# Altium PCB power_blank.PcbDoc
Units mm, origin at the board's own origin, x right, y up, seen from the top; angles counter-clockwise.
Board outline 63.5 x 38.1 mm, 2 copper layers (Top Layer, Bottom Layer); 4 components, 0 nets, 18 pads, 0 vias.
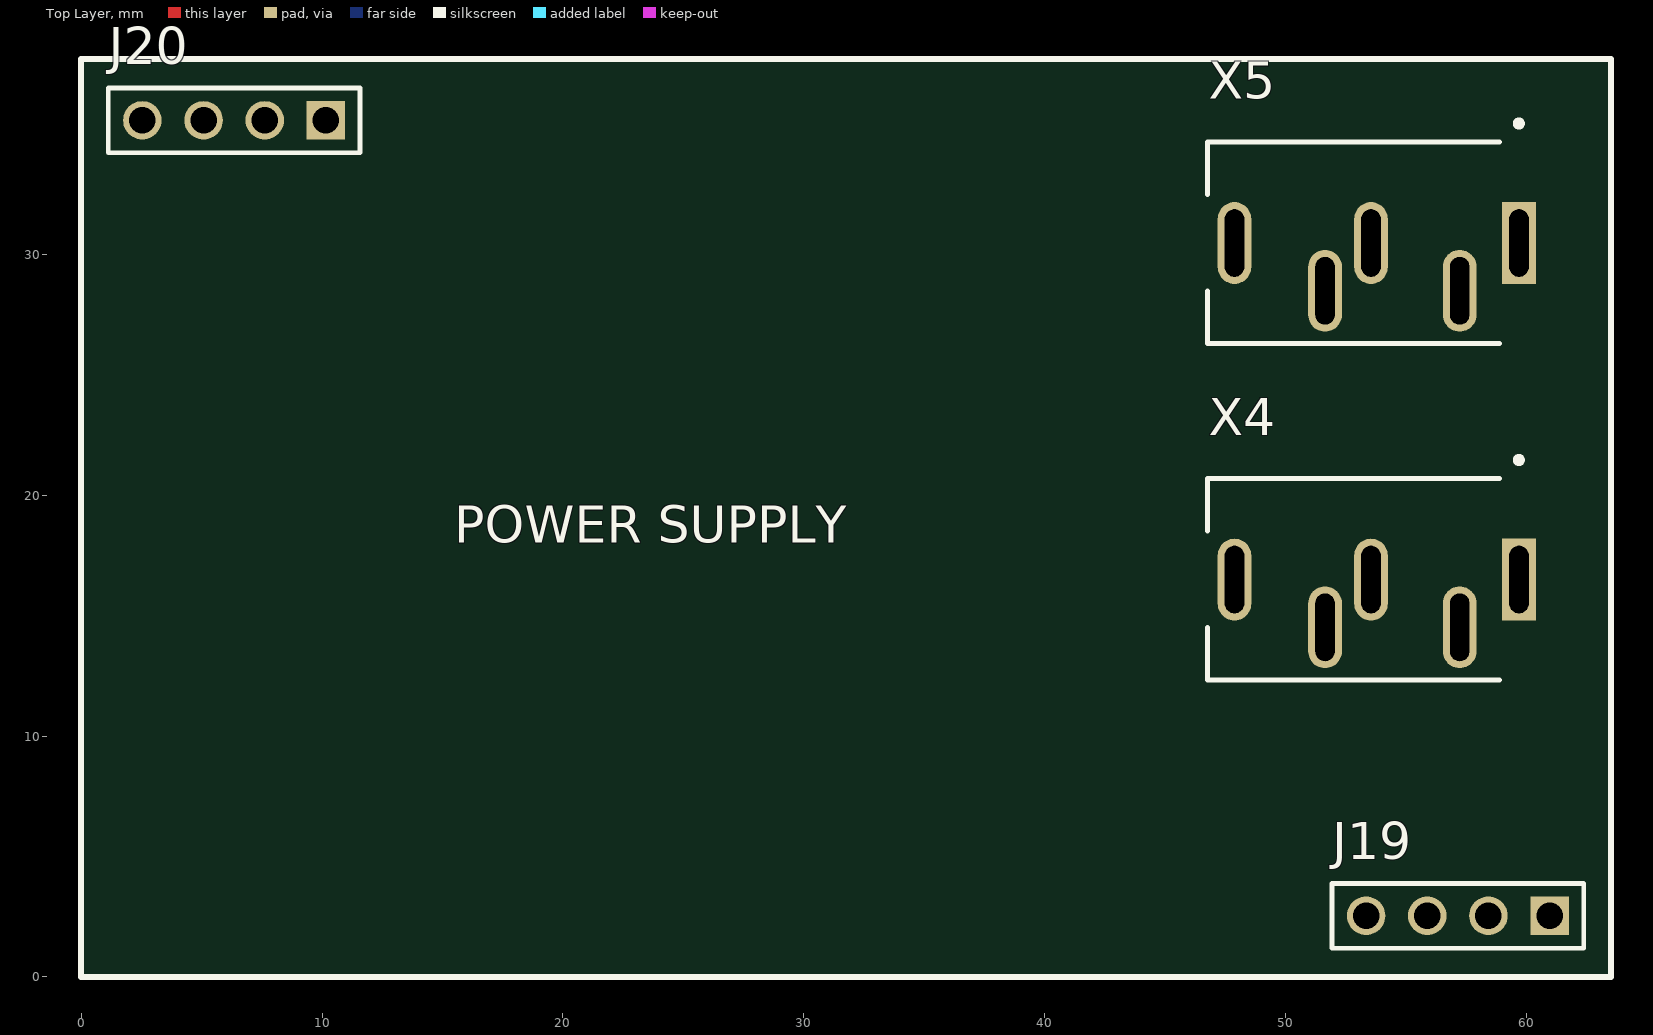
[diagram p0: Top Layer view]
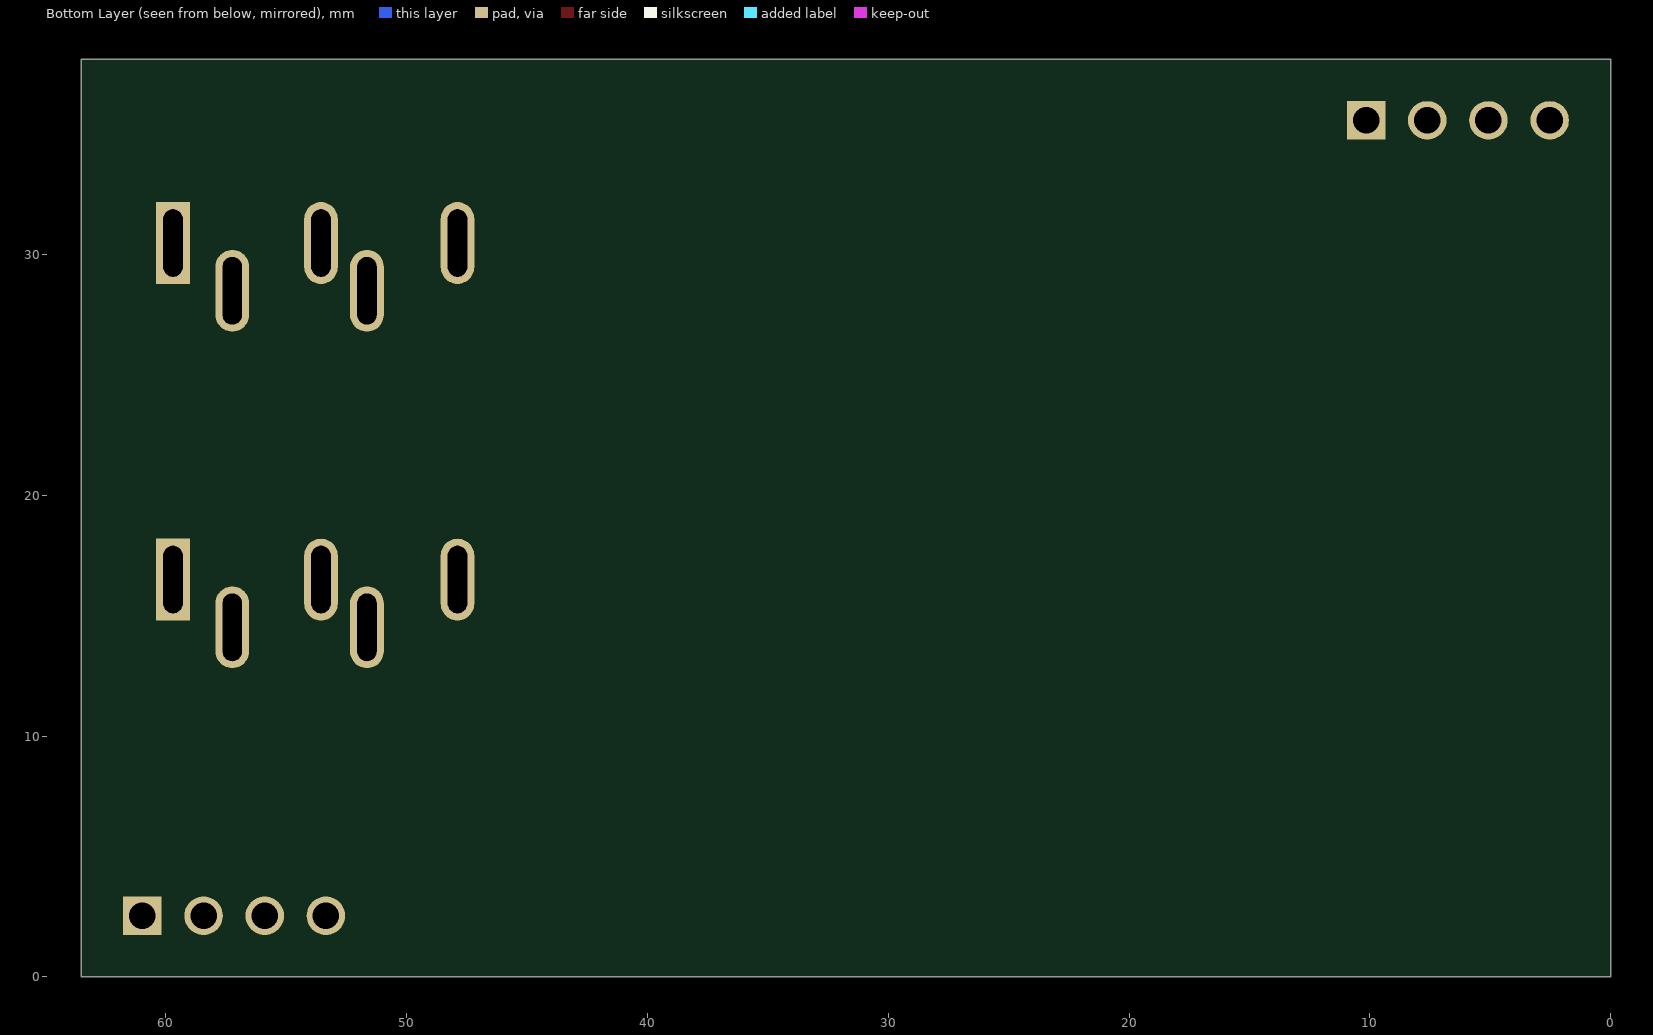
[diagram p1: Bottom Layer view, seen from below]

## Layer stack, top to bottom
Top Solder: solder mask 0.0102, Solder Resist, Dk 3.5
Top Layer: signal copper 0.0356
Dielectric 1: dielectric 0.32, FR-4, Dk 4.8
Bottom Layer: signal copper 0.0356
Bottom Solder: solder mask 0.0102, Solder Resist, Dk 3.5

## Board outline
0,0 63.5,0 63.5,38.1 0,38.1

## Design rules (kind name [scope] priority, off if disabled: settings)
Clearance [All] p1: gap=0.254 ignorepadtopadclearanceinfootprint=FALSE except(0: Arc-Hole Track-Hole SMDPad-Hole THPad-Hole Via-Hole Fill-Hole Poly-Hole Region-Hole Text-Hole)
PolygonConnect [All] p1: connectstyle=Relief reliefconductorwidth=0.254 reliefentries=4 polygonreliefangle="90 Angle" airgapwidth=0.254
RoutingVias [All] p1: holewidth=0.711 width=1.27 viastyle="Through Hole" minholewidth=0.711 minwidth=1.27 maxholewidth=0.711 maxwidth=1.27
SolderMaskExpansion [All] p1: expansion=0.102 istentingtop=FALSE
Width [All] p1: maxlimit=0.254 minlimit=0.254 preferedwidth=0.254
30 further rules are at their usual default settings.

## Components (designator, comment, footprint, x,y, rotation, side; value= is the part's Value field where it differs from the comment)
J19 "IN" 61300411121 57.15,2.54 r180 top
J20 "OUT" 61300411121 6.35,35.56 r180 top
X4 "35RAPC4BV4" FP-35RAPC4BV4-MFG 55.88,16.51 r180 top
X5 "35RAPC4BV4" FP-35RAPC4BV4-MFG 55.88,30.48 r180 top

## Footprints (in the part's own frame and the unit in brackets; to place one, negate y for a bottom-side part, rotate by r counter-clockwise, add the part's x,y. Pads: shape width x height; smd on the part's side, far side on the other; paste and mask are expansions set on the pad)
61300411121 [mm] "Pin Header, pitch 2.54 mm, THT, Vertical, single row, 4p"
  rect 1.6x1.6 hole 1.1: 1(-3.81,0)
  round 1.6 hole 1.1: 2(-1.27,0) 3(1.27,0) 4(3.81,0)
  silkscreen extent -5.23,-1.35 5.23,1.35, body extent -5.08,-1.27 5.08,1.27, height 8.57
FP-35RAPC4BV4-MFG [mm]
  rect 1.4x3.4 hole 2.8 slot 0.8 at 0 deg paste-1000 mask+0: 1(-3.81,0.013)
  rrect100% 1.4x3.4 hole 2.8 slot 0.8 at 0 deg paste-1000 mask+0: 2(-1.346,1.994) 3(2.337,0.013) 4(4.242,1.994) 5(8.001,0.013)
  silkscreen extent -3.93,-5.07 9.12,4.18, body extent -9.22,-4.28 9.22,4.28, height 0.25

## Part data
J19 J20: library part CMP-1502-01064-1, "THT Vertical Pin Header WR-PHD, Pitch 2.54 mm, Single Row, 4 pins", Contact Resistance=20mOhm, Manufacturer="Wurth Elektronik", Operating Temperature=-40to105degC, Package Reference=61300411121, Rated Current=3A, Withstanding Voltage=500VAC, Working Voltage=250VAC, Datasheet URL=https://katalog.we-online.de/em/datasheet/6130xx11121.pdf, Gender=Male, Manufacturer URL=http://www.we-online.de, Mounting Technology=THT, Orientation=Vertical, Packaging=Bag, Part Number=61300411121, Pin Number=4, Pitch=2.54mm, Publisher=WurthElektronik, Row Number=Single
X4 X5: library part CMP-47983-000001-1, "CONN JACK STEREO 3.5MM R/A", Manufacturer=Switchcraft, Automotive=No, Category=Conn, ComponentLink2Description=Datasheet, ComponentLink2URL=http://www.switchcraft.com/Drawings/35rapc__v4_cd.pdf, Conn Orientation="Right Angle", Contact Material=Silver, Device Class L1=Connectors, Device Class L2="Audio / Video Connectors", Device Class L3=unset, Digikey Description="CONN JACK STEREO 3.5MM R/A", Height=0.495inch, Lead Free=Yes, Manufacturer Part Number=35RAPC4BV4, Mouser Description="Phone Connectors 3.5MM VERT STEREO JK", Number Of Contacts=5, Obsolete Part=true, Octopart=https://octopart.com/35rapc4bv4-switchcraft-223606, Package=35RAPC4BV4, RoHS=TRUE

## Nets (pads, with @x,y where several pads share a name; then routed paths per layer and width w, separated by ;. In a path a pad name is that pad's centre, name@x,y a point inside that pad or via, vN(x,y) a via of type N, cw(c..) or ccw(c..) an arc to the next point about the centre after c; other vN are vias at no path point)
pads on no net: J19.1 J19.2 J19.3 J19.4 J20.1 J20.2 J20.3 J20.4 X4.1 X4.2 X4.3 X4.4 X4.5 X5.1 X5.2 X5.3 X5.4 X5.5

## Silkscreen, mask and mechanical layers (free items; w line width, h text height)
Top Overlay:
  the board outline again, w0.254
  text "POWER SUPPLY" at 15.494,18.034 h1.52
Mechanical 1:
  the board outline again, w0.254